# Altium PCB TTFT_1.8.PcbDoc
Units mil, origin at the board's own origin, x right, y up, seen from the top; angles counter-clockwise.
Board outline 880.03 x 595.03 mil, 4 copper layers (Top Layer, Internal Plane 1, Internal Plane 2, Bottom Layer), stack 30.634 mil thick; 20 components, 22 nets, 116 pads, 30 vias.
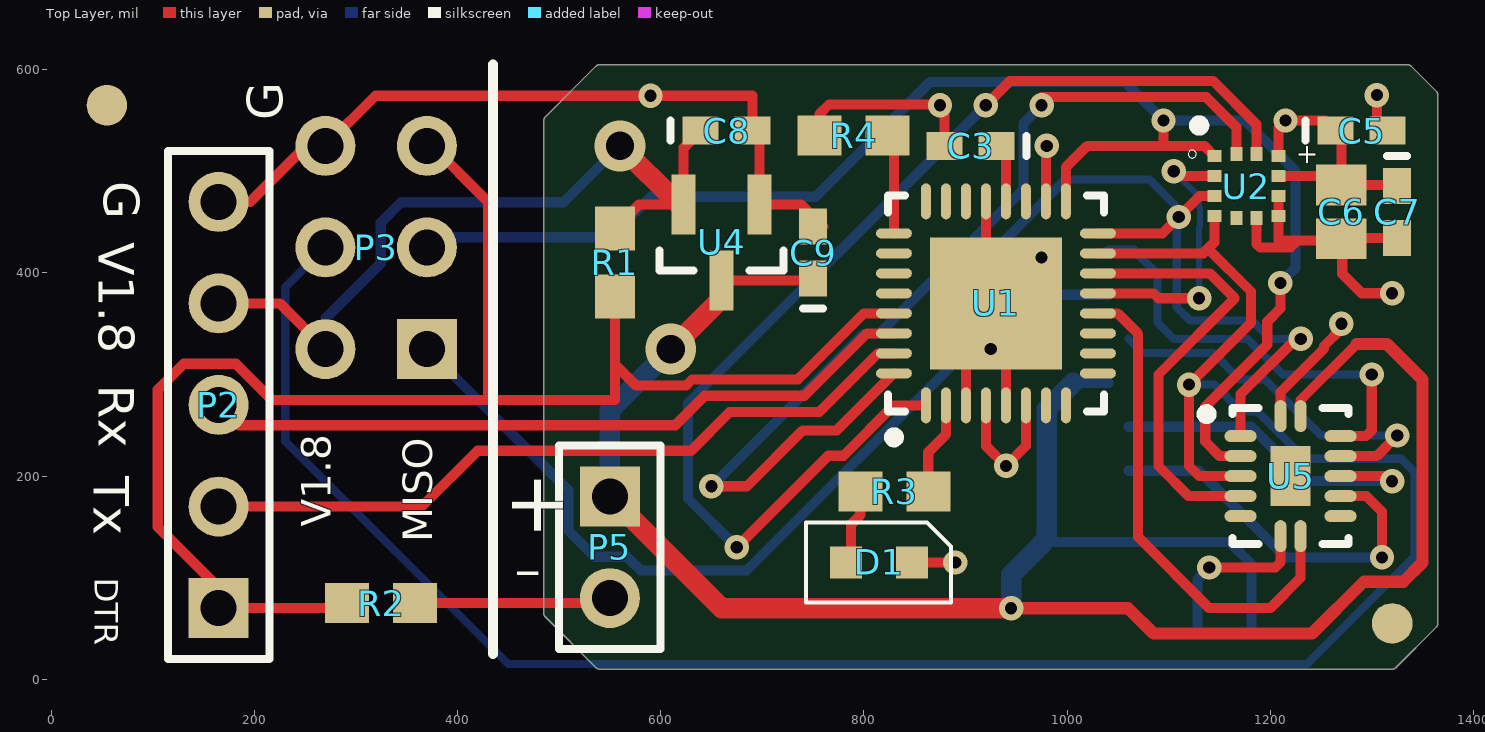
[diagram p0: Top Layer view]
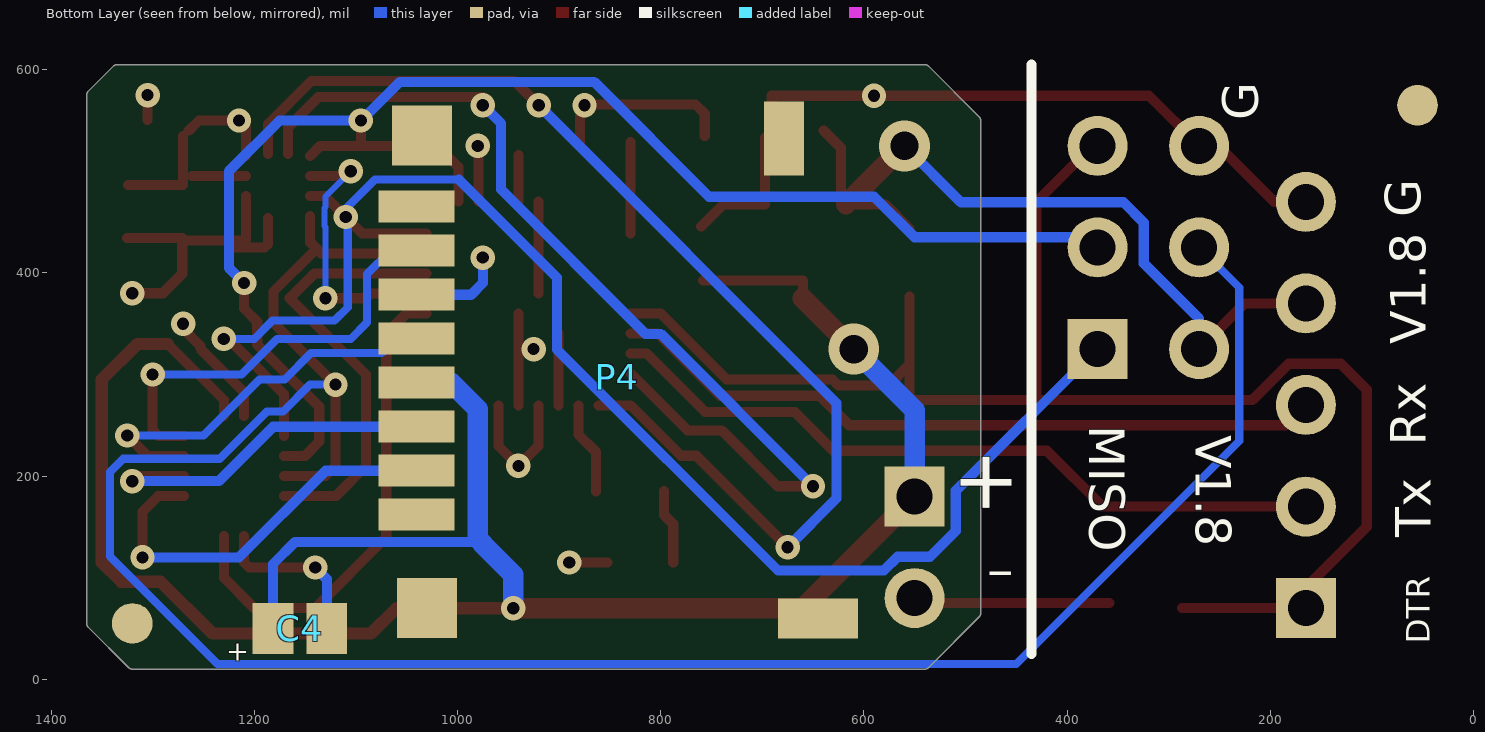
[diagram p1: Bottom Layer view, seen from below]
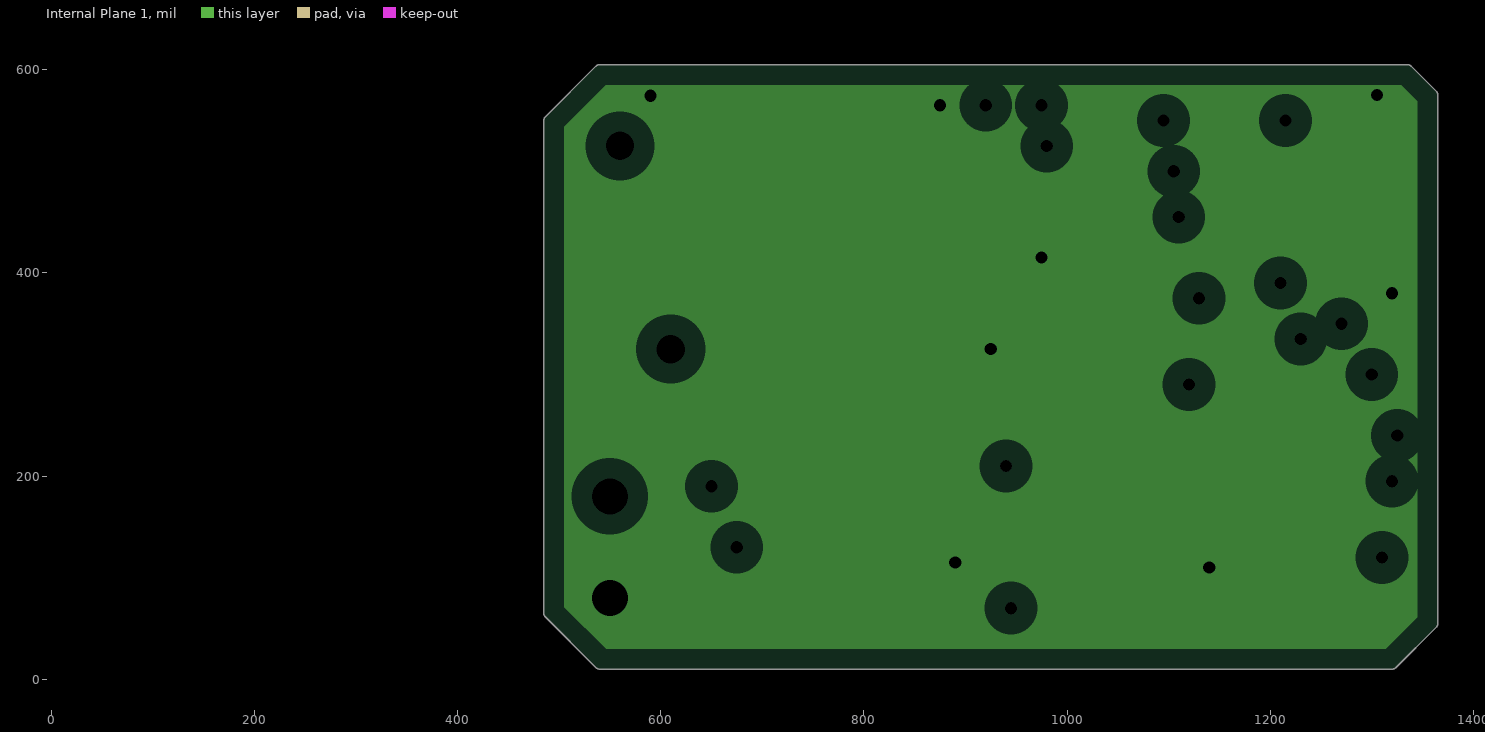
[diagram p2: Internal Plane 1, clearances drawn from the general rule]
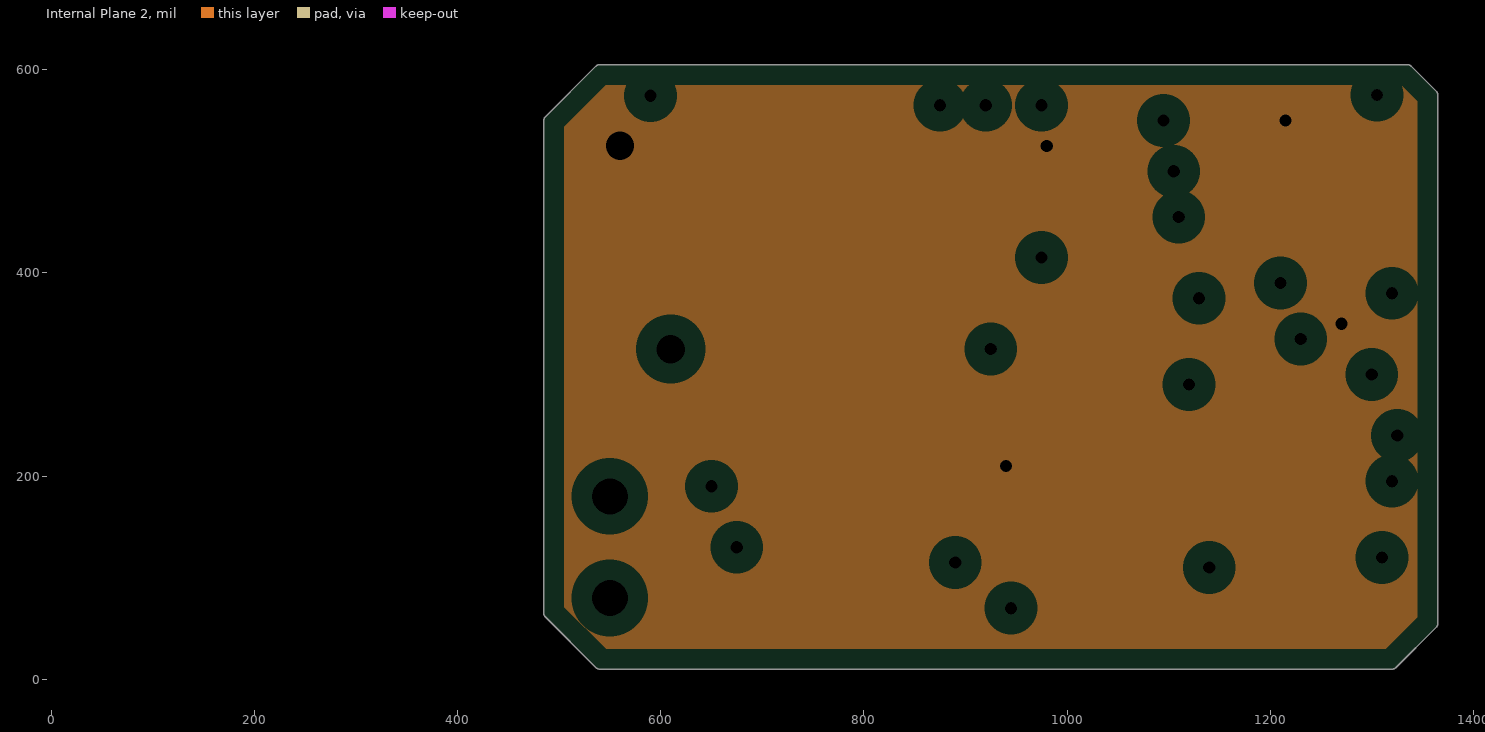
[diagram p3: Internal Plane 2, clearances drawn from the general rule]

## Layer stack, top to bottom
Top Solder: solder mask 0.4, Solder Resist, Dk 3.5
Top Layer: signal copper 1.4
Dielectric 1: core 10, FR-4, Dk 4.2
Internal Plane 1: plane copper 1.417, net GND
Dielectric 3: prepreg 5, Dk 4.2
Internal Plane 2: plane copper 1.417, net V1.8
Dielectric 2: core 10, Dk 4.2
Bottom Layer: signal copper 1.4
Bottom Solder: solder mask 0.4, Solder Resist, Dk 3.5

## Board outline
484.98,65 ccw(c490,65) 486.47,61.44 486.45,61.45 536.45,11.45 536.44,11.47 ccw(c540,15) 540,9.98 1320,9.98 ccw(c1320,15) 1323.56,11.47 1323.55,11.45 1363.55,51.45 1363.53,51.44 ccw(c1360,55) 1365.02,55 1365.02,575 ccw(c1360,575) 1363.53,578.56 1363.55,578.55 1338.55,603.55 1338.56,603.53 ccw(c1335,600) 1335,605.01 540,605.01 ccw(c540,600) 536.44,603.53 536.45,603.55 486.45,553.55 486.47,553.56 ccw(c490,550) 484.98,550

## Design rules (kind name [scope] priority, off if disabled: settings)
Clearance [All] p1: gap=6
PlaneClearance [All] p1: clearance=20
PlaneConnect [All] p1: planeconnectstyle=Relief reliefexpansion=20 reliefentries=4 reliefconductorwidth=10 reliefairgap=10
PolygonConnect [All] p1: connectstyle=Relief reliefconductorwidth=10 reliefentries=4 polygonreliefangle="90 Angle" airgapwidth=10
RoutingVias [All] p1: holewidth=12 width=24 viastyle="Through Hole" minholewidth=12 minwidth=24 maxholewidth=12 maxwidth=24
SolderMaskExpansion [All] p1: expansion=4
Width [All] p1: maxlimit=100 minlimit=6 preferedwidth=10 minimp=50.000000 maximp=50.000000 favimp=50.000000
27 further rules are at their usual default settings.

## Components (designator, comment, footprint, x,y, rotation, side; value= is the part's Value field where it differs from the comment)
C3 "0.1uF" 0402 905,525 r180 top
C4 "10uF" Tant0805 1155,50 r0 bottom
C5 "100nF" 0402 1290,540 r0 top
C6 "10uF" Tant0805 1270,460 r90 top
C7 "100nF" 0402 1325,460 r270 top
C8 "1.0uF" 0402 665,540 r0 top
C9 "1.0uF" 0402 750,420 r90 top
D1 "LED_0603" Diode0603 815,115 r0 top
P2 "Header 5" HDR1X5 165,70 r90 top
P3 "AVR SPI" HDR2X3 370,325 r90 top
P4 "microSD Hirose" "DM3D microSD" 915,225 r180 bottom
P5 "Header 2" HDR1X2 550,180 r270 top
R1 "10k" 3-0603 555,410 r90 top
R2 "omit" 3-0603 325,75 r0 top
R3 "330" 3-0603 830,185 r180 top
R4 "omit" 3-0603 790,535 r180 top
U1 "ATmega8-16AC" 32M1-A_M 930,370 r90 top
U2 "LIS2DS12" LGA-12 1145,515 r0 top
U4 "MCP1700T-1802E/TT" SOT-23-TT3_N 660,430 r270 top
U5 "Level Shifter" DHVQFN14 1220,200 r0 top

## Footprints (in the part's own frame and the unit in brackets; to place one, negate y for a bottom-side part, rotate by r counter-clockwise, add the part's x,y. Pads: shape width x height; smd on the part's side, far side on the other; paste and mask are expansions set on the pad)
3-0603 [mm] "Chip Resistor; Body 1.6 x 0.9 mm (LxW typ)"
  rect 1.1x1 smd: 1(-0.85,0) 2(0.85,0)
32M1-A_M [mm] "QFN, 32-Leads, Body 5x5mm, Pitch 0.5mm, Thermal Pad 3.3x3.3mm, IPC Low Density"
  oval 0.9x0.25 smd: 1(-2.55,1.75) 2(-2.55,1.25) 3(-2.55,0.75) 4(-2.55,0.25) 5(-2.55,-0.25) 6(-2.55,-0.75) 7(-2.55,-1.25) 8(-2.55,-1.75) 17(2.55,-1.75) 18(2.55,-1.25) 19(2.55,-0.75) 20(2.55,-0.25) 21(2.55,0.25) 22(2.55,0.75) 23(2.55,1.25) 24(2.55,1.75)
  oval 0.25x0.9 smd: 9(-1.75,-2.55) 10(-1.25,-2.55) 11(-0.75,-2.55) 12(-0.25,-2.55) 13(0.25,-2.55) 14(0.75,-2.55) 15(1.25,-2.55) 16(1.75,-2.55) 25(1.75,2.55) 26(1.25,2.55) 27(0.75,2.55) 28(0.25,2.55) 29(-0.25,2.55) 30(-0.75,2.55) 31(-1.25,2.55) 32(-1.75,2.55)
  rect 3.3x3.3 smd paste-1.27: 33(0,0)
  silkscreen extent -3.47,-2.7 2.7,2.7, body extent -2.55,-2.55 2.55,2.55, height 1
0402 [mm] "Chip Capacitor; Body 1.0 x 0.5 mm (LxW typ)"
  rect 0.9x0.7 smd: 1(-0.65,0) 2(0.65,0)
  silkscreen extent -1.4,-0.25 -1.4,0.25
DHVQFN14 [mm] "QFN, 14-Leads, Body 2.50x3.00mm, Pitch 0.50mm, Thermal Pad 1.00x1.50mm, IPC Medium Density"
  oval 0.3x0.8 smd: 1(-0.25,1.5) 7(-0.25,-1.5) 8(0.25,-1.5) 14(0.25,1.5)
  oval 0.8x0.3 smd: 2(-1.25,1) 3(-1.25,0.5) 4(-1.25,0) 5(-1.25,-0.5) 6(-1.25,-1) 9(1.25,-1) 10(1.25,-0.5) 11(1.25,0) 12(1.25,0.5) 13(1.25,1)
  rect 1x1.5 smd: 15(0,0)
  silkscreen extent -2.22,-1.7 1.45,1.7, body extent -1.3,-1.55 1.3,1.55, height 1
Diode0603 [mm]
  rect 0.8x0.8 smd: A(-0.825,0) K(0.825,0)
  silkscreen extent -1.83,-1 1.8,1
"DM3D microSD" [mm] "MICROSD_HIROSE Push-Pull"
  rect 1.5x1.5 smd: 0(-3.048,7.874) 0(-2.921,-3.937)
  rect 1x1.85 smd: 0(6,7.8)
  rect 2x1 smd: 0(6.85,-4.191)
  rect 1.9x0.8 smd: 1(-3.188,-1.601) 2(-3.188,-0.501) 3(-3.188,0.599) 4(-3.188,1.699) 5(-3.188,2.799) 6(-3.188,3.899) 7(-3.188,4.999) 8(-3.188,6.099)
  body extent -3.65,-4.45 7.8,7.5, height 1.55
HDR1X2 [mm] "Connector; Header; 2 Position"
  rect 1.5x1.5 hole 0.9: 1(0,0)
  round 1.5 hole 0.9: 2(2.54,0)
  silkscreen extent -1.27,-1.27 3.81,1.27
HDR1X5 [mm] "Connector; Header; 5 Position"
  rect 1.5x1.5 hole 0.9: 1(0,0)
  round 1.5 hole 0.9: 2(2.54,0) 3(5.08,0) 4(7.62,0) 5(10.16,0)
  silkscreen extent -1.27,-1.27 11.43,1.27
HDR2X3 [mm] "Connector; Header; 3x2 Position"
  rect 1.5x1.5 hole 0.9: 1(0,0)
  round 1.5 hole 0.9: 2(0,2.54) 3(2.54,0) 4(2.54,2.54) 5(5.08,0) 6(5.08,2.54)
LGA-12 [mm] "LIS2DS12"
  rect 0.35x0.3 smd: 1(0,0) 2(0,-0.5) 3(0,-1) 4(0,-1.5) 7(1.6,-1.5) 8(1.6,-1) 9(1.6,-0.5) 10(1.6,0)
  rect 0.3x0.35 smd: 5(0.55,-1.55) 6(1.05,-1.55) 11(1.05,0.05) 12(0.55,0.05)
  silkscreen extent -0.65,-0.05 -0.45,0.15
SOT-23-TT3_N [mm] "SOT23, 3-Leads, Body 2.9x1.3mm, Pitch 0.95mm, Lead Span 2.4mm, IPC Medium Density"
  rect 1.5x0.6 smd: 1(-0.95,0.95) 2(-0.95,-0.95) 3(0.95,0)
  silkscreen extent 0.2,-1.55 0.7,1.55, body extent -0.7,-1.52 0.7,1.53, height 1.12
Tant0805 [mil]
  rect 40x50 smd: 1(-26.5,0) 2(26.5,0)

## Part data
C3 C5 C7 C8 C9: library part C0402, "Ceramic Chip Capacitor - Standard"
C4 C6: library part Tant0805
P2: "Header, 5-Pin"
P3: library part "Header 3X2", "Header, 3-Pin, Dual row"
P5: "Header, 2-Pin"
R1 R2 R3 R4: library part ERJ3RK, "Precision Thick Film Chip Resistor, 10 Ohm to 1M Ohm Range, 1% and 0.5% Tolerance, 0603 Size, 0.063 W"
U1: "8-Bit AVR Microcontroller with 8K Bytes of In-System Programmable Flash Memory"
U4: "Low Quiescent Current LDO, 3-Pin SOT-23, Extended Temperature, Tape and Reel"
U5: library part NTB0104, "Voltage level translator"

## Free pads (board coordinates)
  round 40 smd paste-20 mask+5: 0(55,565) 0(1320,55)
  round 40 smd far side paste-20 mask+5: 0(55,565) 0(1320,55)

## Via types
v1: diameter 24, hole 12, Top Layer to Bottom Layer, 28 vias
v2: diameter 50, hole 28, Top Layer to Bottom Layer, 2 vias

## Nets (pads, with @x,y where several pads share a name; then routed paths per layer and width w, separated by ;. In a path a pad name is that pad's centre, name@x,y a point inside that pad or via, vN(x,y) a via of type N, cw(c..) or ccw(c..) an arc to the next point about the centre after c; other vN are vias at no path point)
CS: P4.2 U5.10 | length 376.9
  Top Layer w10: U5.10 1294.69,180.31 1310,165 v1(1310,120)
  Bottom Layer w10: P4.2@1060.51,205.28 1129.72,205.28 1215,120 v1(1310,120)
CS_1.8: U1.14 U5.5 | length 433.9
  Top Layer w10: U1.14 1140.47,399.53 1165,375 1090,300 1090,210 1119.69,180.31 U5.5
CS_LIS_1.8: U1.13 U2.2 | length 277.8
  Top Layer w10: U1.13 1085.16,379.84 1090,375 v1(1130,375) ; v1@1105,495.31 U2.2
  Bottom Layer w6: v1(1105,500) 1130,475 1130,464.7 1131,463.7 1131,446.3 1130,445.3 v1(1130,375)
DTR: P2.1 P3.5 R1.1 R2.1 U1.29 | length 1527.3
  Top Layer w10: R2.1@286.54,70 P2.1 165,90 105,150 105,285 130.53,310.53 181.79,310.53 217.31,275 555,275 R1.1 ; P3.5@372.5,527.5 430,470 430,275 ; 555,310 576,289 624.91,289 630.91,295 735,295 800.16,360.16 U1.29
GND: C3.2 C4.1 C5.2 C6.1 C7.2 C8.2 C9.2 D1.K P2.5 P3.6 P4.6 P5.2 R2.2 R4.2 U1.3 U1.5 U1.21 U1.33 U2.6 U2.7 U2.8 U4.1 U5.7 | length 2038.6
  Top Layer w10: P2.5 196.18,470 270,543.82 P3.6 319.41,574.41 690.59,574.41 C8.2 ; R2.2 P5.2@550,75 ; C8.2@697.4,533.19 U4.1 738.19,467.4 C9.2@760,445.59 ; R4.2 756.54,556.54 765.69,565.69 874.31,565.69 v1(875,565) ; D1.K@852.48,115 v1@895,115 ; C3.2 v1@879.41,560.59 ; U1.3 U1.33@900.47,340.47 ; U1.33@920.16,379.84 U1.21 ; U1.5 U1.33@939.84,360.16 ; v1(1140,110) 1205,110 1210.16,115.16 U5.7 ; U2.6 1186.34,428.66 1190,425 1220,425 1227.01,432.01 ; U2.8 U2.7 1207.99,432.01 1227.01,432.01 ; C6.1 1268.51,432.01 1227.01,432.01 ; C5.2@1305,550.59 v1(1305,575) ; v1(1320,380) 1290,380 1270.91,399.09 1270.91,434.41 C7.2
  Bottom Layer w10: v1(975,415) 975,390 986.5,378.5 P4.6 ; C4.1 1128.5,98.5 v1(1140,110)
  other v1: 890,115 925,325 590,574.41
INT1_1.8: U1.32 U2.12 | length 974.3
  Top Layer w10: v1(650,190) 685,190 740,245 773.5,245 U1.32 ; v1@975,573 1137,573 1166.65,543.35 U2.12
  Bottom Layer w10: v1(650,190) 800,340 815,340 957,482 957,547 v1(975,565)
INT2_1.8: U1.1 U2.11 | length 1143.5
  Top Layer w10: v1(675,130) 765,220 780,220 829.61,269.61 U1.1 ; v1(920,565) 944,589 1143.63,589 1186.34,546.29 U2.11
  Bottom Layer w10: v1(675,130) 627,178 627,272 v1(920,565)
LED1: R3.1 U1.2 | length 91.8
  Top Layer w10: R3.1 863.46,223.46 880.79,240.79 U1.2
LL_OE: U1.12 U5.8 | length 490.3
  Top Layer w10: U1.12 1049.84,360.16 1070,340 1070,140 1140,70 1200,70 1229.84,99.84 U5.8
MISO: P4.7 U5.13 | length 426
  Top Layer w10: U5.13 1294.37,239.37 1300,245 v1(1300,300)
  Bottom Layer w8: P4.7@1065.91,421.81 1088.91,398.81 1088.91,351.09 1105,335 1177.63,335 1212.63,300 v1(1300,300)
  Bottom Layer w10: P4.7 P4.7@1065.91,421.81
MISO_1.8: P3.1 U1.16 U2.3 U5.2 | length 1553.8
  Top Layer w10: U1.16 1093.9,438.9 v1(1110,455) 1130.63,475.63 U2.3 ; U5.2 1170.79,280.53 v1@1230,339.75
  Bottom Layer w8: 998.55,491.87 1081.06,491.87 1110,462.92 v1(1110,455) 1108,453 1108,365.89 1120.89,353 1182,353 1200,335 v1(1230,335)
  Bottom Layer w10: P3.1 509.47,185.53 509.47,145.92 534.86,120.53 566.79,120.53 580.31,107 684.53,107 902,324.47 902,395.31 998.55,491.87
MOSI: P4.3 U5.11 | length 327.5
  Top Layer w10: U5.11 v1@1315,200
  Bottom Layer w10: P4.3@1060.51,248.58 1181.42,248.58 1235,195 v1(1320,195)
MOSI_1.8: P3.4 U1.15 U2.4 U5.4 | length 2250.9
  Top Layer w10: U1.15 1134.21,419.21 1139.61,424.61 ; U2.4 1145,430 1139.61,424.61 ; U5.4 1130,200 1120,210 v1(1120,290) 1181,351 1181,381.63 1139.61,423.02 1139.61,424.61
  Bottom Layer w8: P3.4 230.47,385.47 230.47,234.53 450,15 1236.11,15 1342,120.89 1342,204.11 1329.11,217 1234.21,217 1187.63,263.58 1171.42,263.58 1145,290 v1(1120,290)
NetC3_1: C3.1 U1.20 | length 45.4
  Top Layer w10: U1.20 C3.1@939.84,515.75
NetD1_A: D1.A R3.2 | length 73.7
  Top Layer w10: D1.A@787.52,115 787.52,152.52 796.54,161.54 R3.2
RXD: P2.3 U1.30 | length 710.4
  Top Layer w10: P2.3 185,250 614.37,250 643.37,279 741.63,279 803.1,340.47 U1.30
SCK: P4.5 U5.12 | length 368.1
  Top Layer w10: U5.12 1304.69,219.68 v1(1325,240)
  Bottom Layer w8: P4.5@1060.51,335.2 1074.71,321 1144,321 1170,295 1195,295 1250,240 v1(1325,240)
SCK_1.8: P3.3 U1.17 U2.1 U5.3 | length 1495.9
  Top Layer w10: U1.17 998.9,503.9 1020,525 1095,525 ; v1(1095,550) 1095,525 ; U2.1 1135,525 1095,525 ; U5.3 1150.31,219.68 1136,234 1136,268.37 1197,329.37 1197,352 1210,365 v1(1210,390)
  Bottom Layer w10: P3.3@390,435 550,435 590,475 752.47,475 865.47,588 1056.61,588 1094.61,550 v1(1095,550) 1175,550 1225,500 1225,405 v1(1210,390)
STOP: R4.1 U1.25 | length 90
  Top Layer w10: U1.25 R4.1@829.61,528.86
TXD: P2.2 U1.31 | length 727.1
  Top Layer w10: P2.2 365,170 420,225 630,225 668,263 756.19,263 813.98,320.79 U1.31
V1.8: C5.1 C6.2 C7.1 C8.1 P2.4 P3.2 R1.2 U1.4 U1.6 U1.18 U2.9 U2.10 U4.2 U5.1 | length 1291.5
  Top Layer w10: P2.4 225,370 P3.2 ; R1.2 578.94,467.4 617.6,467.4 U4.2 622.6,523.19 C8.1 ; U1.4 920.16,229.84 v1(940,210) 959.53,229.53 U1.6 ; U1.18 v1@979.21,525 ; U2.9 C6.2@1261.19,495.31 ; U2.10 1207.99,542.99 v1@1210,545 ; U5.1 1210.16,282.63 1253,325.47 1253,328 1270,345 v1(1270,350) ; v1(1215,550) 1254.41,550 C5.1 ; C5.1@1270,534.41 C6.2 C7.1@1324.09,486.5
  Top Layer w20: v2(560,525) U4.2@617.6,467.4
  Bottom Layer w10: 270,355 324.47,409.47 324.47,449.47 344.47,469.47 504.47,469.47 v2(560,525)
  other v1: 980,525
VCC: C4.2 C9.1 P4.4 P5.1 U4.3 U5.14 | length 2143.9
  Top Layer w10: U4.3@660,375 U4.3 C9.1@758.19,392.6 ; U5.14 1229.84,274.84 1285,330
  Top Layer w12: v1(945,70) 1060,70 1085,45 1241.16,45 1292.16,96 1331,96 1350,115 1350,295 1315,330 1285,330
  Top Layer w20: P5.1 660,70 v1(945,70) ; v2(610,325) U4.3@660,375
  Bottom Layer w10: 976.89,135.22 1159.78,135.22 1181.5,113.5 C4.2 ; P4.4@1006.11,291.89 P4.4
  Bottom Layer w20: P5.1 550,265 v2@606.5,321.5 ; v1(945,70) 945,102.89 975,132.89 975,133.33 976.89,135.22 ; 980,138.33 980,265.78 P4.4@1006.11,291.89
pads on no net: P4.0 P4.1 P4.8 U1.7 U1.8 U1.9 U1.10 U1.11 U1.19 U1.22 U1.23 U1.24 U1.26 U1.27 U1.28 U2.5 U5.6 U5.9 U5.15
copper on no net: | length 14.6
  Top Layer w10: 435,590.41 435,605

## Polygon pours and split planes (outlines as drawn)
GND on Internal Plane 1 (split plane): 1344.92,568.75 1344.92,61.25 1313.75,30.08 546.25,30.08 505.08,71.25 505.08,543.75 546.25,584.92 1328.75,584.92
V1.8 on Internal Plane 2 (split plane): 1344.92,568.75 1344.92,61.25 1313.75,30.08 546.25,30.08 505.08,71.25 505.08,543.75 546.25,584.92 1328.75,584.92

## Silkscreen, mask and mechanical layers (free items; w line width, h text height)
Top Overlay:
  circle w10: c1130,545 r5
  lines w10: 435,25 435,605
  text "G" at 240,550 h60 r90
  text "G" at 40,490 h60 r270
  text "V1.8" at 35,430 h60 r270
  text "Rx" at 35,290 h60 r270
  text "+" at 435,205 h100 r270
  text "Tx" at 30,200 h60 r270
  text "DTR" at 35,100 h40 r270
  text "-" at 455,65 h100
Bottom Overlay:
  lines w10: 435,25 435,605
  text "G" at 200,550 h60 r270
  text "G" at 40,455 h60 r270
  text "V1.8" at 35,330 h60 r270
  text "MISO" at 390,250 h60 r90
  text "V1.8" at 285,240 h60 r90
  text "Rx" at 35,230 h60 r270
  text "+" at 435,160 h100 r270
  text "Tx" at 30,140 h60 r270
  text "-" at 480,65 h100
  text "DTR" at 35,35 h40 r270
Mechanical 1:
  lines w10: 0,0 0,615 1320,615 1360,575 1360,30 1330,0 0,0

## Text inside footprints (layer, text, board x,y; h text height)
C4: Bottom Overlay "+" at 1205,35 h19.68 r180
C6: Top Overlay "+" at 1245,505 h19.68 r90
P3: Top Overlay "V1.8" at 285,150 h50 r90; Top Overlay "MISO" at 385,135 h50 r90